# EAGLE board MicroCo (EAGLE 8.3.2)
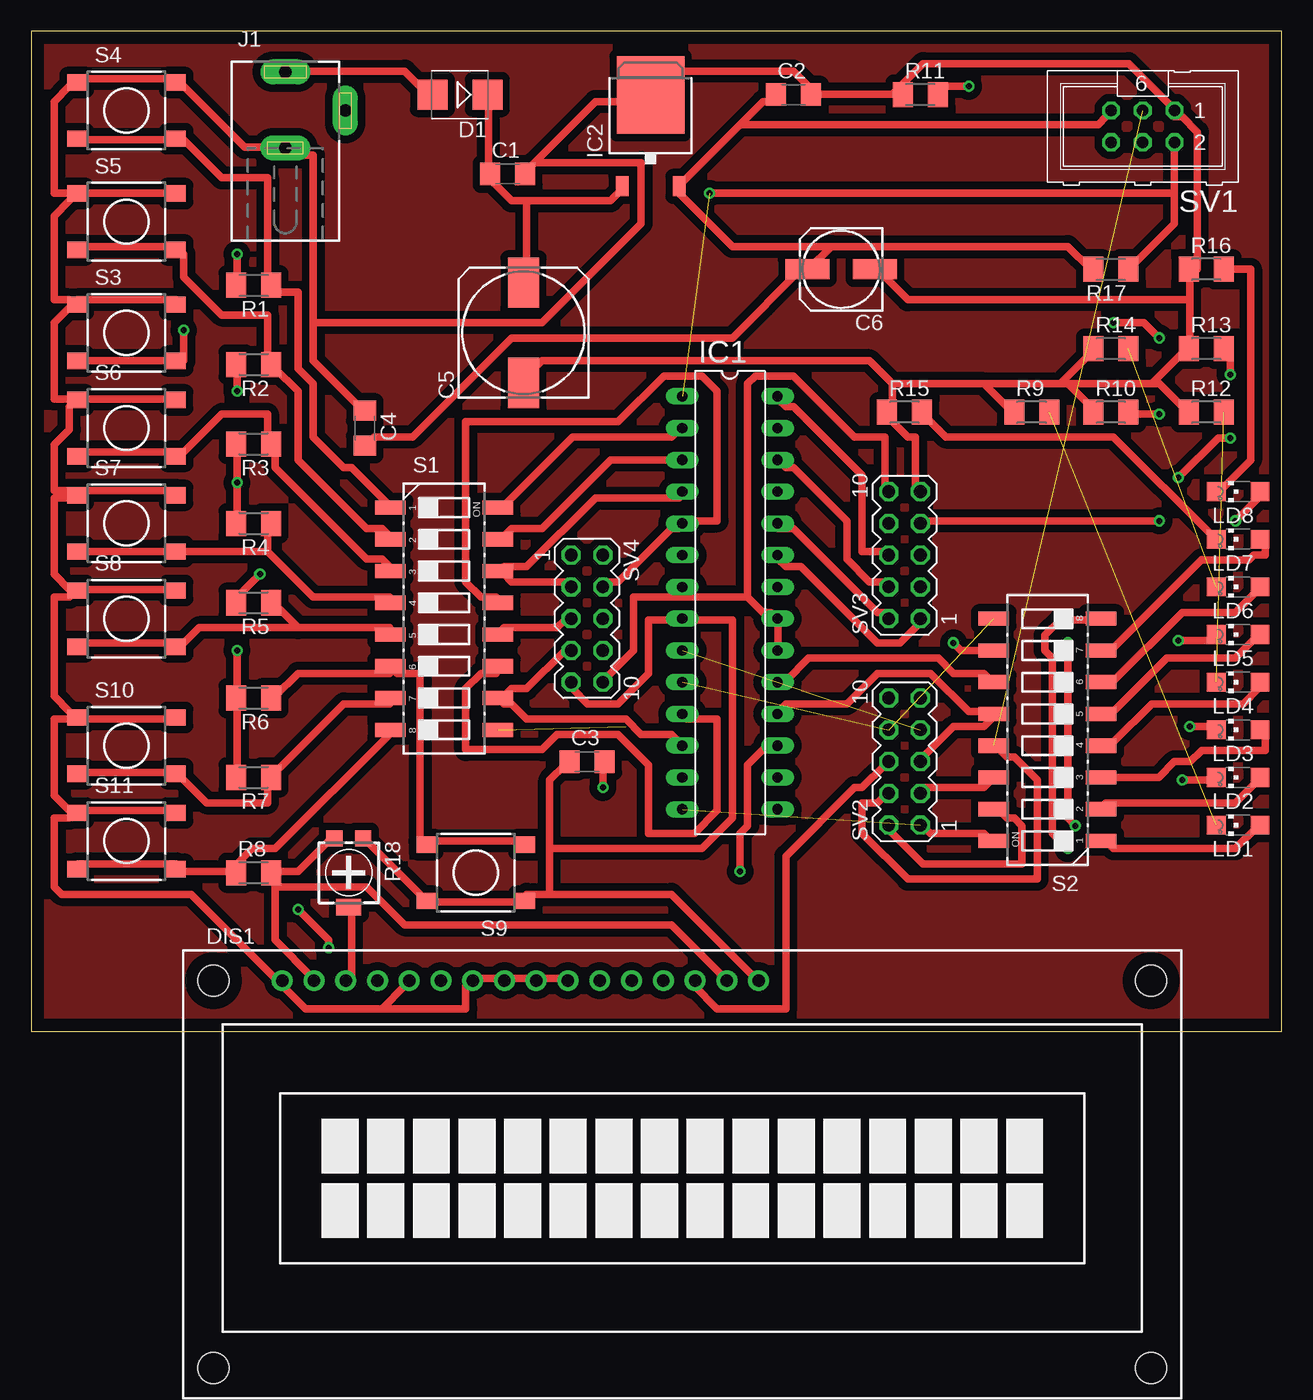
[diagram p0: board, top side]
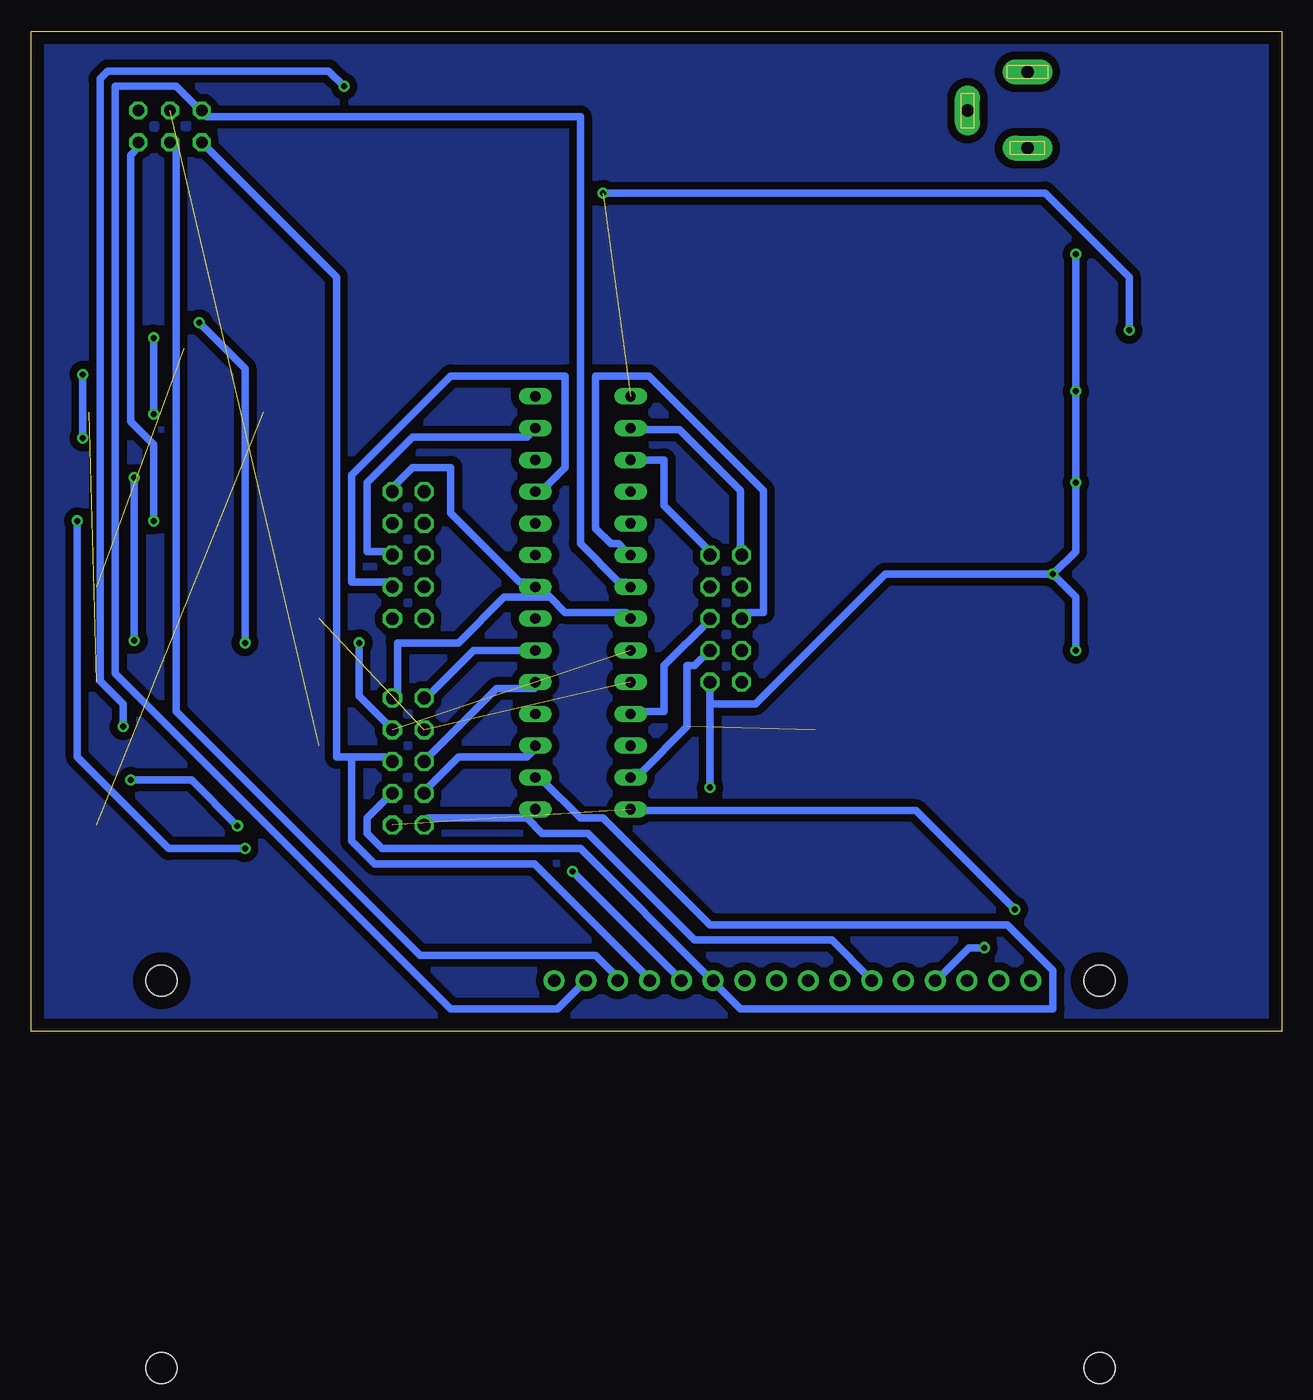
[diagram p1: board, bottom side, seen from below]

Size 100 x 80 mm. Coordinates in mm from the lower left corner, seen from the top.
Outline: 0,0 100,0 100,80 0,80 0,0
Copper layers (1*16): Top 0.035mm / dielectric 1.5mm / Bottom 0.035mm
Design rules "default *": minimum track width 24mil, minimum drill 0.48mm, track to track 24mil, track to pad 24mil, pad to pad 24mil, via to via 24mil, smd to smd 24mil, copper to edge 40mil, drill to drill 6mil, minimum pad ring 10mil, minimum via ring 8mil, stop-mask expansion 4mil, vias tented up to drill 0mil, thermal gap 10mil

## Footprints (pad centres in the part's own frame; a part is rotated, then mirrored left to right if it is on the bottom)
C1206 = smd 1.6 x 1.8: 1 -1.4,0; 2 1.4,0
153CLV-1010 = smd 4 x 2.5: + 4,0; - -4,0
153CLV-0605 = smd 3.5 x 1.6: + 2.7,0; - -2.7,0
SMB = smd 2.4 x 2.4: A 2.2,0; C -2.2,0
TUXGR_16X2_R2 = drill 1 pad 1.676: 1 -32,15.5; 2 -29.46,15.5; 3 -26.92,15.5; 4 -24.38,15.5; 5 -21.84,15.5; 6 -19.3,15.5; 7 -16.76,15.5; 8 -14.22,15.5; 9 -11.68,15.5; 10 -9.14,15.5; 11 -6.6,15.5; 12 -4.06,15.5; 13 -1.52,15.5; 14 1.02,15.5; 15 3.56,15.5; 16 6.1,15.5 | hole 2.5: -37.5,-15.5; 37.5,-15.5; -37.5,15.5; 37.5,15.5
DIL28-3 = drill 0.813 long: 1 -16.51,-3.81; 2 -13.97,-3.81; 3 -11.43,-3.81; 4 -8.89,-3.81; 5 -6.35,-3.81; 6 -3.81,-3.81; 7 -1.27,-3.81; 8 1.27,-3.81; 9 3.81,-3.81; 10 6.35,-3.81; 11 8.89,-3.81; 12 11.43,-3.81; 13 13.97,-3.81; 14 16.51,-3.81; 15 16.51,3.81; 16 13.97,3.81; 17 11.43,3.81; 18 8.89,3.81; 19 6.35,3.81; 20 3.81,3.81; 21 1.27,3.81; 22 -1.27,3.81; 23 -3.81,3.81; 24 -6.35,3.81; 25 -8.89,3.81; 26 -11.43,3.81; 27 -13.97,3.81; 28 -16.51,3.81
TO252 = smd 1 x 1.6: 1 -2.28,-4.8; 2 2.28,-4.8 | smd 5.4 x 6.2: 3 0,2.5
DCJ0202 = drill 1 pad 2 long: 1 0,3.1; 2 4.8,0; 3 0,-3
CHIPLED_1206 = smd 1.5 x 1.5: A 0,-1.75; C 0,1.75
M1206 = smd 1.6 x 2: 1 -1.4,0; 2 1.4,0
RTRIM4G/J = smd 1.3 x 1.3: 1 -1.15,-2.75; 3 1.15,-2.75 | smd 2 x 1.3: 2 0,2.75
CTS-219-08 = smd 1.13 x 2.44: 1 -8.89,-4.3; 2 -6.35,-4.3; 3 -3.81,-4.3; 4 -1.27,-4.3; 5 1.27,-4.3; 6 3.81,-4.3; 7 6.35,-4.3; 8 8.89,-4.3; 9 8.89,4.3; 10 6.35,4.3; 11 3.81,4.3; 12 1.27,4.3; 13 -1.27,4.3; 14 -3.81,4.3; 15 -6.35,4.3; 16 -8.89,4.3
DTSM-6 = smd 1.55 x 1.3: 1 -3.975,2.25; 2 3.975,2.25; 3 -3.975,-2.25; 4 3.975,-2.25
ML6 = drill 0.914 octagon: 1 -2.54,-1.27; 2 -2.54,1.27; 3 0,-1.27; 4 0,1.27; 5 2.54,-1.27; 6 2.54,1.27
MA05-2 = drill 1.016 octagon: 1 -5.08,-1.27; 2 -5.08,1.27; 3 -2.54,-1.27; 4 -2.54,1.27; 5 0,-1.27; 6 0,1.27; 7 2.54,-1.27; 8 2.54,1.27; 9 5.08,-1.27; 10 5.08,1.27

## Placement (x,y rotation side)
C1  [C1206]  38.1,68.58 0 top
C2  [C1206]  60.96,74.93 0 top
C3  [C1206]  44.45,21.59 0 top
C4  [C1206]  26.67,48.26 270 top
C5  [153CLV-1010]  39.37,55.88 90 top
C6  [153CLV-0605]  64.77,60.96 180 top
D1  ES2D  [SMB]  34.29,74.93 180 top
DIS1  TUXGR_16X2_R2  [TUXGR_16X2_R2]  52.07,-11.43 0 top
IC1  MEGA8-P  [DIL28-3]  55.88,34.29 270 top
IC2  7805DT  [TO252]  49.53,72.39 0 top
J1  DCJ0202  [DCJ0202]  20.32,73.66 0 top
LD1  [CHIPLED_1206]  96.52,16.51 90 top
LD2  [CHIPLED_1206]  96.52,20.32 90 top
LD3  [CHIPLED_1206]  96.52,24.13 90 top
LD4  [CHIPLED_1206]  96.52,27.94 90 top
LD5  [CHIPLED_1206]  96.52,31.75 90 top
LD6  [CHIPLED_1206]  96.52,35.56 90 top
LD7  [CHIPLED_1206]  96.52,39.37 90 top
LD8  [CHIPLED_1206]  96.52,43.18 90 top
R1  [M1206]  17.78,59.69 180 top
R2  [M1206]  17.78,53.34 180 top
R3  [M1206]  17.78,46.99 180 top
R4  [M1206]  17.78,40.64 180 top
R5  [M1206]  17.78,34.29 180 top
R6  [M1206]  17.78,26.67 180 top
R7  [M1206]  17.78,20.32 180 top
R8  [M1206]  17.78,12.7 0 top
R9  [M1206]  80.01,49.53 0 top
R10  [M1206]  86.36,49.53 0 top
R11  [M1206]  71.12,74.93 0 top
R12  [M1206]  93.98,49.53 0 top
R13  [M1206]  93.98,54.61 0 top
R14  [M1206]  86.36,54.61 0 top
R15  [M1206]  69.85,49.53 0 top
R16  [M1206]  93.98,60.96 0 top
R17  [M1206]  86.36,60.96 180 top
R18  [RTRIM4G/J]  25.4,12.7 180 top
S1  219-08  [CTS-219-08]  33.02,33.02 270 top
S2  219-08  [CTS-219-08]  81.28,24.13 90 top
S3  DTSM-6  [DTSM-6]  7.62,55.88 0 top
S4  DTSM-6  [DTSM-6]  7.62,73.66 0 top
S5  DTSM-6  [DTSM-6]  7.62,64.77 0 top
S6  DTSM-6  [DTSM-6]  7.62,48.26 0 top
S7  DTSM-6  [DTSM-6]  7.62,40.64 0 top
S8  DTSM-6  [DTSM-6]  7.62,33.02 0 top
S9  DTSM-6  [DTSM-6]  35.56,12.7 180 top
S10  DTSM-6  [DTSM-6]  7.62,22.86 0 top
S11  DTSM-6  [DTSM-6]  7.62,15.24 0 top
SV1  [ML6]  88.9,72.39 180 top
SV2  [MA05-2]  69.85,21.59 90 top
SV3  [MA05-2]  69.85,38.1 90 top
SV4  [MA05-2]  44.45,33.02 270 top

## Library data of the parts
C1-C6 R1-R18 = rcl
D1 = diode
DIS1 = display-lcd; OC_FARNELL: unknown; OC_NEWARK: unknown
IC1 = atmel; OC_FARNELL: unknown; OC_NEWARK: unknown
IC2 = linear
J1 = con-jack; OC_FARNELL: unknown; OC_NEWARK: unknown
LD1-LD8 = led
S1 S2 = switch-dil; OC_FARNELL: unknown; OC_NEWARK: unknown
S3-S11 = switch-tact
SV1 = con-ml; OC_FARNELL: unknown; OC_NEWARK: unknown
SV2-SV4 = con-lstb; OC_FARNELL: unknown; OC_NEWARK: unknown

## Nets
BP0: R1.1 S1.1 S4.3 S4.4
BP1: R2.1 S1.2 S5.3 S5.4
BP2: R3.1 S1.3 S6.3 S6.4
BP3: R4.1 S1.4 S7.3 S7.4
BP4: R5.1 S1.5 S8.3 S8.4
BP5: R6.1 S1.6 S9.3 S9.4
BP6: R7.1 S1.7 S10.3 S10.4
BP7: R8.1 S1.8 S11.3 S11.4
GND: C1.2 C2.2 C3.1 C4.1 C5.- C6.- DIS1.1 DIS1.5 DIS1.7 DIS1.8 DIS1.9 DIS1.10 DIS1.16 IC1.8 IC1.22 IC2.3 J1.3 R9.1 R10.1 R11.1 R12.1 R13.1 R14.1 R15.1 R16.1 R18.1 S3.1 S3.2 S4.1 S4.2 S5.1 S5.2 S6.1 S6.2 S7.1 S7.2 S8.1 S8.2 S9.1 S9.2 S10.1 S10.2 S11.1 S11.2 SV1.1 SV2.9 SV3.9 SV4.9
LED0: LD1.A S2.1
LED1: LD2.A S2.2
LED2: LD3.A S2.3
LED3: LD4.A S2.4
LED4: LD5.A S2.5
LED5: LD6.A S2.6
LED6: LD7.A S2.7
LED7: LD8.A S2.8
N$1: DIS1.3 R18.2
N$2: D1.A J1.1
N$3: C1.1 C5.+ D1.C IC2.1
N$4: LD1.C R9.2
N$5: LD2.C R10.2
N$6: LD3.C R11.2
N$7: LD4.C R12.2
N$8: LD5.C R13.2
N$9: LD6.C R14.2
N$10: LD7.C R15.2
N$11: LD8.C R16.2
PB0: DIS1.4 IC1.14 S2.16 SV2.1
PB1: DIS1.6 IC1.15 S2.15 SV2.2
PB2: DIS1.11 IC1.16 S2.14 SV2.3
PB3: DIS1.12 IC1.17 S2.13 SV1.3 SV2.4
PB4: DIS1.13 IC1.18 S2.12 SV1.6 SV2.5
PB5: DIS1.14 IC1.19 S2.11 SV1.4 SV2.6
PB6: IC1.9 S2.10 SV2.7
PB7: IC1.10 S2.9 SV2.8
PC0: IC1.23 SV3.1
PC1: IC1.24 SV3.2
PC2: IC1.25 SV3.3
PC3: IC1.26 SV3.4
PC4: IC1.27 SV3.5
PC5: IC1.28 SV3.6
PC6: IC1.1 R17.1 S3.3 S3.4 SV1.2 SV3.7
PD0: IC1.2 S1.16 SV4.1
PD1: IC1.3 S1.15 SV4.2
PD2: IC1.4 S1.14 SV4.3
PD3: IC1.5 S1.13 SV4.4
PD4: IC1.6 S1.12 SV4.5
PD5: IC1.11 S1.11 SV4.6
PD6: IC1.12 S1.10 SV4.7
PD7: IC1.13 S1.9 SV4.8
VCC: C2.1 C3.2 C4.2 C6.+ DIS1.2 DIS1.15 IC1.7 IC1.20 IC1.21 IC2.2 R1.2 R2.2 R3.2 R4.2 R5.2 R6.2 R7.2 R8.2 R17.2 R18.3 SV1.5 SV2.10 SV3.10 SV4.10

## Tracks (layer width: path | path; a pad name or v marks a point on that pad's centre or on a via)
BP0
  Top 0.61: S4.3 3.66,71.32 11.58,71.32 S4.4 12.19,71.32 15.24,68.28 18.9,68.28 18.9,59.74 R1.1 19.51,59.13 21.34,59.13 21.34,53.03 22.55,51.82 22.55,47.55 24.99,45.11 25.6,45.11 28.65,42.06 S1.1
BP1
  Top 0.61: S5.3 3.66,62.79 11.58,62.79 S5.4 12.19,62.18 12.19,60.35 15.24,57.3 18.9,57.3 18.9,53.65 R2.1 19.51,53.03 21.34,51.21 21.34,45.72 26.82,40.23 28.04,40.23 28.65,39.62 S1.2
BP2
  Top 0.61: S6.3 3.66,46.33 11.58,46.33 S6.4 12.19,46.33 15.24,49.38 18.9,49.38 18.9,47.55 R3.1 19.51,46.94 19.51,45.11 26.82,37.8 28.04,37.8 28.65,37.19 S1.3
BP3
  Top 0.61: S7.3 3.66,38.41 11.58,38.41 S7.4 12.19,38.41 18.9,38.41 | 18.9,38.41 18.9,40.23 R4.1 | 18.9,38.41 22.55,34.75 28.65,34.75 S1.4
BP4
  Top 0.61: S8.3 3.66,31.09 11.58,31.09 S8.4 12.19,31.09 13.41,32.31 21.34,32.31 | 21.34,32.31 19.51,34.14 R5.1 | 21.34,32.31 28.65,32.31 S1.5
BP5
  Top 0.61: S9.3 39.01,15.24 31.7,15.24 S9.4 31.09,15.24 31.09,28.65 29.26,28.65 S1.6 28.65,28.65 21.34,28.65 19.51,26.82 R6.1
BP6
  Top 0.61: S10.3 3.66,20.73 11.58,20.73 S10.4 12.19,20.12 14.02,18.29 18.9,18.29 18.9,20.12 R7.1 19.51,20.73 24.99,26.21 28.65,26.21 S1.7
BP7
  Top 0.61: S11.3 3.66,13.41 11.58,13.41 S11.4 12.19,12.8 15.85,12.8 | 15.85,12.8 17.68,14.63 19.51,14.63 28.65,23.77 S1.8 | 15.85,12.8 R8.1
GND
  Top 0.61: 22.55,56.69 22.55,70.1 20.73,70.1 J1.3 20.12,70.71 17.07,70.71 12.19,75.59 S4.2 11.58,76.2 3.66,76.2 S4.1 3.05,75.59 1.83,74.37 1.83,67.06 3.05,67.06 S5.1 | 22.55,56.69 22.55,53.65 26.21,49.99 C4.1 | DIS1.10 42.67,4.27 40.84,4.27 DIS1.9 40.23,4.27 38.41,4.27 DIS1.8 37.8,4.27 35.36,4.27 DIS1.7 34.75,3.66 34.75,1.83 28.04,1.83 | 28.04,1.83 21.95,1.83 20.12,3.66 DIS1.1 19.51,4.27 12.8,10.97 2.44,10.97 1.83,11.58 1.83,17.07 3.05,17.07 S11.1 | 28.04,1.83 29.87,3.66 DIS1.5 | S11.1 3.66,17.68 11.58,17.68 S11.2 | S10.1 3.66,24.99 11.58,24.99 S10.2 | S11.1 3.05,17.68 1.83,18.9 1.83,24.99 3.05,24.99 S10.1 | S5.1 3.66,67.06 11.58,67.06 S5.2 | S3.1 3.66,58.52 11.58,58.52 S3.2 | S6.1 3.66,50.6 11.58,50.6 S6.2 | S8.1 3.66,35.36 11.58,35.36 S8.2 | S7.1 3.66,43.28 11.58,43.28 S7.2 | S8.1 3.05,35.36 1.83,36.58 1.83,42.67 3.05,42.67 S7.1 | S6.1 3.05,49.99 3.05,48.16 1.83,46.94 1.83,43.28 3.05,43.28 S7.1 | S3.1 3.05,57.91 1.83,56.69 1.83,50.6 3.05,50.6 S6.1 | S5.1 3.05,66.45 1.83,65.23 1.83,58.52 3.05,58.52 S3.1 | S10.1 3.05,25.6 1.83,26.82 1.83,34.75 3.05,34.75 S8.1 | 40.23,69.49 45.11,74.37 49.38,74.37 IC2.3 49.99,74.98 51.82,76.81 60.96,76.81 62.79,74.98 | 40.23,69.49 39.62,68.89 C1.2 | 68.89,74.98 69.49,74.98 R11.1 | 68.89,74.98 62.79,74.98 | 68.89,74.98 71.32,77.42 87.78,77.42 91.44,73.76 SV1.1 91.44,73.15 92.05,73.15 93.27,71.93 93.27,60.96 92.66,60.96 | 62.79,74.98 C2.2 | R18.1 26.82,15.24 31.09,10.97 S9.2 31.7,10.36 39.01,10.36 S9.1 39.62,10.97 41.45,10.97 | 41.45,10.97 41.45,14.63 | 41.45,14.63 41.45,20.12 42.67,21.34 C3.1 | 41.45,10.97 51.21,10.97 57.91,4.27 DIS1.16
  Top 0.61: SV4.9 43.28,27.43 44.5,26.21 46.94,26.21 49.38,28.65 49.38,32.92 51.82,32.92 IC1.8 52.43,32.92 56.08,32.92 56.08,17.07 53.65,14.63 41.45,14.63 | 68.89,51.82 68.89,49.99 R15.1 68.28,49.38 70.1,47.55 70.71,47.55 70.71,43.28 SV3.9 | 76.2,51.82 68.89,51.82 | 76.2,51.82 78.03,49.99 R9.1 | 82.91,51.82 84.73,49.99 R10.1 | 76.2,51.82 82.3,51.82 | 82.3,51.82 82.91,51.82 | 82.3,51.82 84.73,54.25 R14.1 | 82.91,51.82 89.61,51.82 | 89.61,51.82 90.22,51.82 92.05,49.99 R12.1 | 89.61,51.82 92.05,54.25 R13.1 92.66,54.86 92.66,58.52 | 92.66,58.52 92.66,60.96 | 92.66,58.52 70.1,58.52 67.67,60.96 C6.- | 68.89,51.82 67.06,53.65 40.84,53.65 39.62,52.43 C5.- | 92.66,60.96 R16.1 | 22.55,56.69 40.84,56.69 48.77,64.62 48.77,69.49 40.23,69.49
  Bottom 0.61: 58.52,34.75 59.13,35.36 IC1.22 59.74,35.97 60.96,35.97 66.45,41.45 66.45,45.11 69.49,45.11 71.32,43.28 SV3.9 | 58.52,34.75 57.3,33.53 52.43,33.53 IC1.8 | 58.52,34.75 62.18,34.75 65.84,31.09 70.71,31.09 70.71,26.82 SV2.9
LED0
  Top 0.61: LD1.A 98.15,16.46 96.32,14.63 86.56,14.63 85.95,15.24 S2.1
LED1
  Top 0.61: LD2.A 98.15,20.12 96.32,18.29 85.95,18.29 S2.2
LED2
  Top 0.61: S2.3 90.17,20.32 91.44,21.59 92.71,21.59 93.61,22.49 93.64,22.47 95.9,22.47 95.93,22.49 98.68,22.49 98.68,23.72 LD3.A
LED3
  Top 0.61: LD4.A 98.15,27.43 96.93,26.21 89.61,26.21 86.56,23.16 85.95,23.16 S2.4
LED4
  Top 0.61: LD5.A 98.15,31.7 96.32,29.87 90.83,29.87 86.56,25.6 85.95,25.6 S2.5
LED5
  Top 0.61: LD6.A 98.15,35.36 96.32,33.53 92.05,33.53 86.56,28.04 85.95,28.04 S2.6
LED6
  Top 0.61: S2.7 86.36,30.48 93.61,37.73 93.64,37.71 97.4,37.71 97.79,38.1 98.68,38.1 98.68,38.96 LD7.A
LED7  (via drill 0.48)
  Top 0.61: v96.32,40.84 98.15,42.67 LD8.A | v82.91,14.63 81.69,15.85 81.69,29.87 81.08,30.48 81.08,31.7 82.3,32.92 85.34,32.92 S2.8
  Bottom 0.61: v96.32,40.84 96.32,21.95 89,14.63 v82.91,14.63
N$1
  Top 0.61: R18.2 25.6,9.75 25.6,4.27 DIS1.3
N$2
  Top 0.61: D1.A 31.7,74.98 29.87,76.81 20.73,76.81 J1.1
N$3
  Top 0.61: 39.62,66.45 38.41,66.45 36.58,68.28 C1.1 36.58,68.89 36.58,74.37 D1.C | 39.62,66.45 46.33,66.45 46.94,67.06 IC2.1 | 39.62,66.45 39.62,60.35 C5.+
N$4  (1 unrouted)
N$5  (via drill 0.48)
  Top 0.61: v92.05,20.12 94.49,20.12 LD2.C | v83.52,16.46 82.91,17.07 v82.91,31.09 | v86.56,56.69 89,56.69 v90.22,55.47 | v90.22,49.38 87.78,49.38 R10.2
  Bottom 0.61: v92.05,20.12 87.17,20.12 v83.52,16.46 | v82.91,31.09 82.91,53.03 v86.56,56.69 | v90.22,49.38 v90.22,55.47
N$6  (via drill 0.48)
  Top 0.61: v92.66,24.38 94.49,24.38 LD3.C | v74.98,75.59 73.15,75.59 72.54,74.98 R11.2
  Bottom 0.61: v92.66,24.38 92.66,26.21 94.49,28.04 94.49,76.2 93.88,76.81 76.2,76.81 v74.98,75.59
N$7  (1 unrouted)
N$8  (via drill 0.48)
  Top 0.61: v91.76,31.27 94.14,31.27 94.61,31.75 LD5.C | v91.76,44.29 94.93,47.47 v95.89,47.47 | v95.89,52.55 95.89,54.61 R13.2
  Bottom 0.61: v91.76,44.29 v91.76,31.27 | v95.89,52.55 v95.89,47.47
N$9  (1 unrouted)
N$10
  Top 0.61: LD7.C 94.49,39.62 86.56,47.55 73.15,47.55 71.32,49.38 R15.2
N$11
  Top 0.61: R16.2 97.54,60.96 97.54,45.72 95.1,43.28 LD8.C
PB0  (via drill 0.48)  (1 unrouted)
  Top 0.61: S2.16 76.81,15.24 76.2,15.85 71.93,15.85 71.32,16.46 SV2.1 | v21.34,9.75 23.77,7.32 v23.77,6.71
  Bottom 0.61: v21.34,9.75 29.26,17.68 51.82,17.68 IC1.14 | v23.77,6.71 24.99,6.71 27.43,4.27 DIS1.4
PB1
  Top 0.61: S2.15 77.42,17.68 78.03,17.07 78.64,17.07 79.25,16.46 79.25,13.41 71.32,13.41 68.28,16.46 SV2.2
  Bottom 0.61: 60.35,17.07 59.74,17.68 IC1.15 | 60.35,17.07 68.28,17.07 SV2.2 | 60.35,17.07 59.13,15.85 55.47,15.85 46.94,7.32 35.97,7.32 32.92,4.27 DIS1.6
PB2
  Top 0.61: S2.14 76.81,20.12 76.2,19.51 71.32,19.51 SV2.3
  Bottom 0.61: IC1.16 59.13,20.12 56.08,17.07 54.25,17.07 45.72,8.53 21.95,8.53 18.29,4.88 18.29,1.83 43.28,1.83 45.11,3.66 DIS1.11 45.72,4.27 56.08,14.63 71.93,14.63 73.15,15.85 73.15,17.07 71.32,18.9 SV2.3
PB3  (via drill 0.48)  (1 unrouted)
  Top 0.61: S2.13 77.42,22.55 78.03,21.95 78.64,21.95 80.47,20.12 80.47,12.19 70.1,12.19 66.45,15.85 66.45,18.29 67.67,18.29 68.28,18.9 SV2.4 | v56.69,12.8 56.69,15.85 57.3,16.46 57.3,21.34 59.13,23.16 IC1.17
  Bottom 0.61: IC1.17 59.74,22.55 60.35,21.95 65.84,21.95 68.28,19.51 SV2.4 | v56.69,12.8 48.16,4.27 DIS1.12
PB4
  Top 0.61: SV2.5 71.32,21.95 73.76,24.38 76.2,24.38 76.81,24.99 S2.12 76.81,25.6 74.98,25.6 71.93,28.65 67.67,28.65 65.23,26.21 60.35,26.21 59.74,25.6 IC1.18
  Bottom 0.61: SV1.6 75.59,60.35 75.59,21.95 74.37,21.95 | 74.37,21.95 71.32,21.95 SV2.5 | 74.37,21.95 74.37,15.24 72.54,13.41 59.74,13.41 50.6,4.27 DIS1.13
PB5
  Top 0.61: S2.11 76.81,28.04 76.2,28.65 73.76,28.65 72.54,29.87 62.18,29.87 60.35,28.04 59.74,28.04 IC1.19 | SV2.6 68.28,21.34 66.45,19.51 65.84,19.51 60.35,14.02 60.35,1.83 54.86,1.83 53.03,3.66 DIS1.14
  Bottom 0.61: SV2.6 68.28,21.95 62.79,27.43 59.74,27.43 IC1.19 | SV1.4 88.39,70.71 88.39,25.6 68.89,6.1 54.86,6.1 53.03,4.27 DIS1.14
PB6  (via drill 0.48)  (1 unrouted)
  Top 0.61: S2.10 74.37,30.48 v73.76,31.09
  Bottom 0.61: v73.76,31.09 73.76,26.82 71.32,24.38 SV2.7
PB7  (2 unrouted)
PC0
  Top 0.61: IC1.23 59.74,37.8 60.35,37.19 61.57,37.19 67.67,31.09 69.49,31.09 71.32,32.92 SV3.1
PC1
  Top 0.61: IC1.24 59.74,40.23 60.96,40.23 67.67,33.53 68.28,33.53 SV3.2
PC2
  Bottom 0.61: IC1.25 59.13,43.28 57.3,45.11 57.3,52.43 66.45,52.43 74.37,44.5 74.37,35.97 71.32,35.97 SV3.3
PC3
  Top 0.61: IC1.26 59.74,45.72 60.35,45.11 60.96,45.11 65.23,40.84 65.23,37.8 67.06,35.97 68.28,35.97 SV3.4
PC4
  Bottom 0.61: IC1.27 59.74,48.16 60.35,47.55 69.49,47.55 73.15,43.89 73.15,38.41 71.32,38.41 SV3.5
PC5
  Top 0.61: IC1.28 59.74,50.6 60.35,49.99 60.96,49.99 66.45,44.5 66.45,38.41 68.28,38.41 SV3.6
PC6  (via drill 0.48)  (1 unrouted)
  Top 0.61: S3.3 3.66,53.65 11.58,53.65 S3.4 12.19,53.65 v12.19,56.08 | SV1.2 91.44,67.06 | 91.44,67.06 91.44,64.62 87.78,60.96 R17.1 | v90.22,40.84 71.32,40.84 SV3.7 | 91.44,67.06 v54.25,67.06
  Bottom 0.61: v90.22,40.84 90.22,46.94 92.05,48.77 92.05,70.1 91.44,70.71 SV1.2 | v12.19,56.08 12.19,60.35 18.9,67.06 v54.25,67.06
PD0
  Top 0.61: S1.16 37.8,42.06 43.28,47.55 51.21,47.55 51.82,48.16 IC1.2
  Bottom 0.61: SV4.1 43.28,38.41 43.28,43.28 48.16,48.16 51.82,48.16 IC1.2
PD1
  Top 0.61: IC1.3 46.33,45.72 40.84,40.23 38.41,40.23 37.8,39.62 S1.15
  Bottom 0.61: IC1.3 49.38,45.72 49.38,42.06 45.72,38.41 SV4.2
PD2
  Top 0.61: SV4.3 42.67,35.97 38.41,35.97 37.8,36.58 S1.14 37.8,37.19 39.62,37.19 45.11,42.67 51.82,42.67 IC1.4
PD3
  Top 0.61: S1.13 37.19,34.75 35.97,34.75 34.75,35.97 34.75,48.77 46.94,48.77 50.6,52.43 53.65,52.43 54.86,51.21 54.86,40.84 52.43,40.84 IC1.5 51.82,40.23 51.21,40.23 46.94,35.97 45.72,35.97 SV4.4
PD4
  Top 0.61: S1.12 37.8,32.31 42.06,32.31 42.67,32.92 SV4.5
  Bottom 0.61: IC1.6 52.43,38.41 53.03,39.01 53.65,39.01 54.86,40.23 54.86,52.43 50.6,52.43 41.45,43.28 41.45,33.53 42.67,33.53 SV4.5
PD5
  Top 0.61: S1.11 37.19,28.65 35.97,28.65 34.75,27.43 34.75,22.55 40.84,22.55 42.06,23.77 46.94,23.77 49.38,21.34 49.38,15.85 53.03,15.85 54.86,17.68 54.86,24.99 52.43,24.99 IC1.11
  Bottom 0.61: SV4.6 45.72,32.92 49.38,29.26 49.38,25.6 51.82,25.6 IC1.11
PD6
  Top 0.61: SV4.7 42.67,30.48 39.62,27.43 38.41,27.43 37.8,26.82 S1.10 37.8,26.21 38.41,26.21 39.62,24.99 47.55,24.99 48.77,23.77 51.21,23.77 51.82,23.16 IC1.12
PD7  (1 unrouted)
  Bottom 0.61: SV4.8 46.94,29.26 47.55,29.26 47.55,24.38 51.21,20.73 51.82,20.73 IC1.13
S$1
  pour Top: 0,80.01 100.33,80.01 100.33,0 0,0
S$2
  pour Bottom: 0,80.01 100.33,80.01 100.33,0 0,0
VCC  (via drill 0.48)
  Top 0.61: IC1.20 59.74,30.48 59.74,32.92 IC1.21 59.13,33.53 58.52,33.53 57.3,34.75 | 53.03,34.75 52.43,35.36 IC1.7 | 57.3,34.75 53.03,34.75 | 53.03,34.75 48.16,34.75 48.16,30.48 45.72,28.04 SV4.10 | 57.3,34.75 57.3,51.82 57.91,52.43 60.96,52.43 65.84,47.55 68.28,47.55 68.28,43.28 SV3.10 | R18.3 23.77,15.24 21.34,12.8 19.51,12.8 R8.2 19.51,12.19 19.51,11.58 | 19.51,11.58 19.51,7.32 22.55,4.27 DIS1.2 | 19.51,11.58 26.82,11.58 29.87,8.53 51.21,8.53 55.47,4.27 DIS1.15 | 56.69,72.54 58.52,74.37 59.13,74.37 C2.1 | 56.69,72.54 51.82,67.67 IC2.2 51.82,67.06 56.08,62.79 64.01,62.79 | 56.69,72.54 85.34,72.54 85.95,73.15 SV1.5 | C4.2 26.82,46.94 27.43,47.55 30.48,47.55 38.41,55.47 56.08,55.47 61.57,60.96 C6.+ 62.18,60.96 64.01,62.79 | 64.01,62.79 82.91,62.79 84.73,60.96 R17.2 | R4.2 16.46,40.84 v16.46,43.89 16.46,46.94 R3.2 | R7.2 16.46,20.73 16.46,26.21 R6.2 16.46,26.82 v16.46,30.48 | v45.72,19.51 45.72,21.34 C3.2 | v18.29,36.58 16.46,34.75 R5.2 | v16.46,51.21 16.46,53.03 R2.2 | v16.46,62.18 16.46,59.74 R1.2
  Bottom 0.61: IC1.20 64.62,30.48 68.28,26.82 SV2.10 | DIS1.15 56.08,3.66 57.91,1.83 66.45,1.83 93.27,28.65 93.27,75.59 88.39,75.59 86.56,73.76 SV1.5 85.95,73.15 56.08,73.15 56.08,39.01 53.03,35.97 52.43,35.97 IC1.7 | SV4.10 45.72,26.21 | 45.72,26.21 v45.72,19.51 | v18.29,36.58 31.7,36.58 42.06,26.21 45.72,26.21 | v18.29,36.58 16.46,38.41 v16.46,43.89 v16.46,51.21 v16.46,62.18 | v16.46,30.48 16.46,34.75 v18.29,36.58